# EAGLE board CT_schematic (EAGLE 7.6.0)

Size 100 x 80 mm. Coordinates in mm from the lower left corner, seen from the top.
Outline: 0,0 100,0 100,80 0,80 0,0
Copper layers (1*16): Top 0.035mm / dielectric 1.5mm / Bottom 0.035mm
Design rules "default": minimum track width 10mil, minimum drill 24mil, track to track 8mil, track to pad 8mil, pad to pad 8mil, via to via 8mil, smd to smd 8mil, copper to edge 40mil, drill to drill 8mil, minimum pad ring 10mil, minimum via ring 8mil, stop-mask expansion 4mil, vias tented up to drill 0mil, thermal gap 10mil

## Footprints (pad centres in the part's own frame; a part is rotated, then mirrored left to right if it is on the bottom)
C0603 = smd 0.8 x 0.8: 1 -0.762,0; 2 0.762,0
C0402 = smd 0.5 x 0.5: 1 -0.508,0; 2 0.508,0
C0805 = smd 1.2 x 1.3: 1 -1.016,0; 2 1.016,0
C1206 = smd 1.3 x 1.6: 1 -1.524,0; 2 1.524,0
L0603 = smd 0.8 x 0.8: 1 -0.762,0; 2 0.762,0
DR1040 = smd 1.6 x 3.2: 1 -4.458,0; 2 4.458,0
R0603 = smd 0.8 x 0.8: 1 -0.762,0; 2 0.762,0
UFQFPN48 = smd 0.559 x 0.305: 1 -3.375,2.751; 2 -3.375,2.251; 3 -3.375,1.75; 4 -3.375,1.25; 5 -3.375,0.75; 6 -3.375,0.25; 7 -3.375,-0.25; 8 -3.375,-0.75; 9 -3.375,-1.25; 10 -3.375,-1.75; 11 -3.375,-2.251; 12 -3.375,-2.751; 25 3.375,-2.751; 26 3.375,-2.251; 27 3.375,-1.75; 28 3.375,-1.25; 29 3.375,-0.75; 30 3.375,-0.25; 31 3.375,0.25; 32 3.375,0.75; 33 3.375,1.25; 34 3.375,1.75; 35 3.375,2.251; 36 3.375,2.751 | smd 0.305 x 0.559: 13 -2.751,-3.375; 14 -2.251,-3.375; 15 -1.75,-3.375; 16 -1.25,-3.375; 17 -0.75,-3.375; 18 -0.25,-3.375; 19 0.25,-3.375; 20 0.75,-3.375; 21 1.25,-3.375; 22 1.75,-3.375; 23 2.251,-3.375; 24 2.751,-3.375; 37 2.751,3.375; 38 2.251,3.375; 39 1.75,3.375; 40 1.25,3.375; 41 0.75,3.375; 42 0.25,3.375; 43 -0.25,3.375; 44 -0.75,3.375; 45 -1.25,3.375; 46 -1.75,3.375; 47 -2.251,3.375; 48 -2.751,3.375 | smd 5.588 x 5.588: 49 0,0
ABLS-25.000MHZ-B2F-T = smd 5.6 x 2.8: 1 -3.81,0; 2 5.69,0
ASEK = smd 1.4 x 1: 1 -1.1,-0.8; 2 1.1,-0.8; 3 1.1,0.8; 4 -1.1,0.8
TSOT-23-5 = smd 1.3 x 0.62: 1 -1.31,0.95; 2 -1.31,0; 3 -1.31,-0.95; 4 1.31,-0.95; 5 1.31,0.95
DFN8_2X3MC = smd 0.813 x 0.305: 1 -1.398,0.75; 2 -1.398,0.25; 3 -1.398,-0.25; 4 -1.398,-0.75; 5 1.398,-0.75; 6 1.398,-0.25; 7 1.398,0.25; 8 1.398,0.75 | smd 1.753 x 1.549: 9 0,0
JST-2-SMD = smd 1 x 4.6: 1 -1,-3.7; 2 1,-3.7 | smd 1.6 x 3.4: NC1 -3.4,1.5; NC2 3.4,1.5
FCI_10118193-0001LF = smd 0.4 x 1.35: 1 -1.3,2.675; 2 -0.65,2.675; 3 0,2.675; 4 0.65,2.675; 5 1.3,2.675 | smd 1.6 x 1.4: 6 -3.2,2.45; 7 3.2,2.45 | smd 1.9 x 1.9: 8 -1.2,0; 9 1.2,0 | hole 0.5: -3.3,0; 3.3,0
SON-6 = smd 0.55 x 0.3: 1 -0.355,0.5 | smd 0.52 x 0.3: 2 -0.37,0; 3 -0.37,-0.5; 4 0.37,-0.5; 5 0.37,0; 6 0.37,0.5
SW_4-1437565-2 = smd 1.4 x 2.1: 1 -2.23,4.55; 2 -2.23,-4.55; 3 2.23,4.55; 4 2.23,-4.55
LGM67K-G1J2-24-Z = smd 0.8 x 1.4: A -2,0; C 0,0
NC7SZ125M5X = smd 1.3 x 0.7: 1 -1.3,0.95; 2 -1.3,0; 3 -1.3,-0.95; 4 1.3,-0.95; 5 1.3,0.95
DUMMY_PACKAGE_93 = drill 0.3: 1 0,-1; 2 1.5,-1; 3 3,-1

## Placement (x,y rotation side)
C1  1e-06  [C0603]  -38.1,46.99 0 top  (outside the outline)
C2  1e-07  [C0603]  -41.91,46.99 0 top  (outside the outline)
C3  1e-07  [C0603]  -45.72,46.99 0 top  (outside the outline)
C4  1e-07  [C0603]  -49.53,46.99 0 top  (outside the outline)
C5  4.7e-06  [C0603]  -34.29,46.99 0 top  (outside the outline)
C6  1e-07  [C0603]  -53.34,46.99 0 top  (outside the outline)
C7  1e-08  [C0603]  -15.24,52.07 0 top  (outside the outline)
C8  1e-06  [C0603]  -19.05,52.07 0 top  (outside the outline)
C9  1e-11  [C0402]  -41.91,52.07 0 top  (outside the outline)
C10  1e-11  [C0402]  -45.72,52.07 0 top  (outside the outline)
C11  1e-08  [C0402]  -49.53,52.07 0 top  (outside the outline)
C12  1e-05  [C0805]  -46.99,34.29 0 top  (outside the outline)
C13  1e-05  [C0805]  -52.07,34.29 0 top  (outside the outline)
C14  1e-07  [C0402]  -53.34,52.07 0 top  (outside the outline)
C15  1e-05  [C1206]  -29.21,34.29 0 top  (outside the outline)
C16  1e-05  [C1206]  -35.56,34.29 0 top  (outside the outline)
C17  1e-08  [C0402]  -15.24,57.15 0 top  (outside the outline)
F1  240.0  [L0603]  -22.86,52.07 0 top  (outside the outline)
I1  7e-06  [DR1040]  -38.1,6.35 0 top  (outside the outline)
R1  10000.0  [R0603]  -43.18,41.91 0 top  (outside the outline)
R2  1000.0  [R0603]  -26.67,52.07 0 top  (outside the outline)
R3  910.0  [R0603]  -30.48,52.07 0 top  (outside the outline)
R4  4700.0  [R0603]  -34.29,52.07 0 top  (outside the outline)
R5  10000.0  [R0603]  -48.26,41.91 0 top  (outside the outline)
R6  10000.0  [R0603]  -53.34,41.91 0 top  (outside the outline)
R7  490000.0  [R0603]  -27.94,41.91 0 top  (outside the outline)
R8  1000000.0  [R0603]  -22.86,41.91 0 top  (outside the outline)
R9  10000.0  [R0603]  -15.24,46.99 0 top  (outside the outline)
R10  10000.0  [R0603]  -20.32,46.99 0 top  (outside the outline)
R11  82000.0  [R0603]  -25.4,46.99 0 top  (outside the outline)
R12  300000.0  [R0603]  -33.02,41.91 0 top  (outside the outline)
R13  120000.0  [R0603]  -38.1,41.91 0 top  (outside the outline)
R14  2000.0  [R0603]  -38.1,52.07 0 top  (outside the outline)
R15  10000.0  [R0603]  -30.48,46.99 0 top  (outside the outline)
U1  stm32f058c8u7  [UFQFPN48]  -33.02,16.51 0 top  (outside the outline)
U2  ABLS-25.000MHZ-B2F-T  [ABLS-25.000MHZ-B2F-T]  -48.26,27.94 0 top  (outside the outline)
U3  ASEK-2-32.768KHz-ECST  [ASEK]  -31.75,27.94 0 top  (outside the outline)
U4  ltc3406es5  [TSOT-23-5]  -15.24,40.64 0 top  (outside the outline)
U5  MCP73831T-2ACI/MC  [DFN8_2X3MC]  -30.48,55.88 0 top  (outside the outline)
U6  S2B-PH-SM4-TB(LF)(SN)  [JST-2-SMD]  -22.86,19.05 0 top  (outside the outline)
U7  10118193-0001LF  [FCI_10118193-0001LF]  -44.45,16.51 0 top  (outside the outline)
U8  TPS3895ADRYR  [SON-6]  -24.13,55.88 0 top  (outside the outline)
U9  4-1437565-2  [SW_4-1437565-2]  -27.94,6.35 0 top  (outside the outline)
U10  Q65110A2395  [LGM67K-G1J2-24-Z]  -17.78,35.56 0 top  (outside the outline)
U11  nc7sz125m5x  [NC7SZ125M5X]  -40.64,34.29 0 top  (outside the outline)
U12  Dummy  [DUMMY_PACKAGE_93]  -21.59,57.15 0 top  (outside the outline)

## Library data of the parts
C1-C17 F1 I1 R1-R15 U1-U12 = circuit_tree

## Nets
CLK_CRYSTAL_U1_5: C9.1 U1.5 U2.1
CLK_CRYSTAL_U1_6: C10.1 U1.6 U2.2
CLK_U1_3: U1.3 U3.3
GND: C1.2 C2.2 C3.2 C4.2 C5.2 C6.2 C7.2 C8.2 C9.2 C10.2 C11.2 C12.2 C13.1 C13.2 C14.2 C15.2 C16.2 C17.2 R2.2 R5.2 R6.2 R7.2 R11.2 R13.2 R14.2 U1.8 U1.23 U1.47 U1.49 U3.2 U4.2 U5.6 U5.9 U6.2 U7.5 U7.6 U7.7 U7.8 U7.9 U8.2 U10.C U11.1 U11.3 U12.1
INPUT_USBPOWER_5V: C15.1 R15.2 U5.1 U5.2 U7.1
NET_U1_7: R4.1 U1.7 U11.4
NET_U1_9: C7.1 C8.1 F1.1 U1.9
NET_U1_20: R6.1 U1.20
NET_U1_44: R5.1 U1.44
NET_U1_45: R3.1 U1.45 U10.A
NET_U1_46: R1.1 U1.46 U9.3 U9.4
NET_U4_1: U4.1
NET_U4_3: I1.1 U4.3
NET_U4_5: R7.1 R8.1 U4.5
NET_U4_ATNET_3: I1.2 R8.2
NET_U5_5: R15.1 U5.5
NET_U5_8: R14.1 U5.8
NET_U8_1: R10.1 R11.1 U8.1
NET_U8_3: R12.2 R13.1 U8.3
NET_U8_4: R9.1 U8.4 U11.2
NET_U9_1: R2.1 U9.1 U9.2
PROC_ADC_IN3: U1.13 U12.2
PROC_ADC_IN4: U1.14 U12.3
VCC_S1_3V7: C12.1 C16.1 U4.4 U5.3 U5.4 U6.1
VCC_TIER1_1V8: C1.1 C2.1 C3.1 C4.1 C5.1 C6.1 C11.1 C13.2 C14.1 C17.1 F1.2 I1.2 R1.2 R3.2 R4.2 R8.2 R9.2 R10.2 R12.1 U1.1 U1.24 U1.48 U3.4 U8.6 U11.5

## Tracks (layer width: path | path; a pad name or v marks a point on that pad's centre or on a via)
CLK_CRYSTAL_U1_5  (2 unrouted)
CLK_CRYSTAL_U1_6  (2 unrouted)
CLK_U1_3  (1 unrouted)
GND  (43 unrouted)
INPUT_USBPOWER_5V  (4 unrouted)
NET_U1_7  (2 unrouted)
NET_U1_9  (3 unrouted)
NET_U1_20  (1 unrouted)
NET_U1_44  (1 unrouted)
NET_U1_45  (2 unrouted)
NET_U1_46  (3 unrouted)
NET_U4_3  (1 unrouted)
NET_U4_5  (2 unrouted)
NET_U4_ATNET_3  (1 unrouted)
NET_U5_5  (1 unrouted)
NET_U5_8  (1 unrouted)
NET_U8_1  (2 unrouted)
NET_U8_3  (2 unrouted)
NET_U8_4  (2 unrouted)
NET_U9_1  (2 unrouted)
PROC_ADC_IN3  (1 unrouted)
PROC_ADC_IN4  (1 unrouted)
VCC_S1_3V7  (5 unrouted)
VCC_TIER1_1V8  (24 unrouted)